# EAGLE board femtoBeacon_dongle_r2.0.1_PANELIZED (EAGLE 7.5.0), part 1 of 2
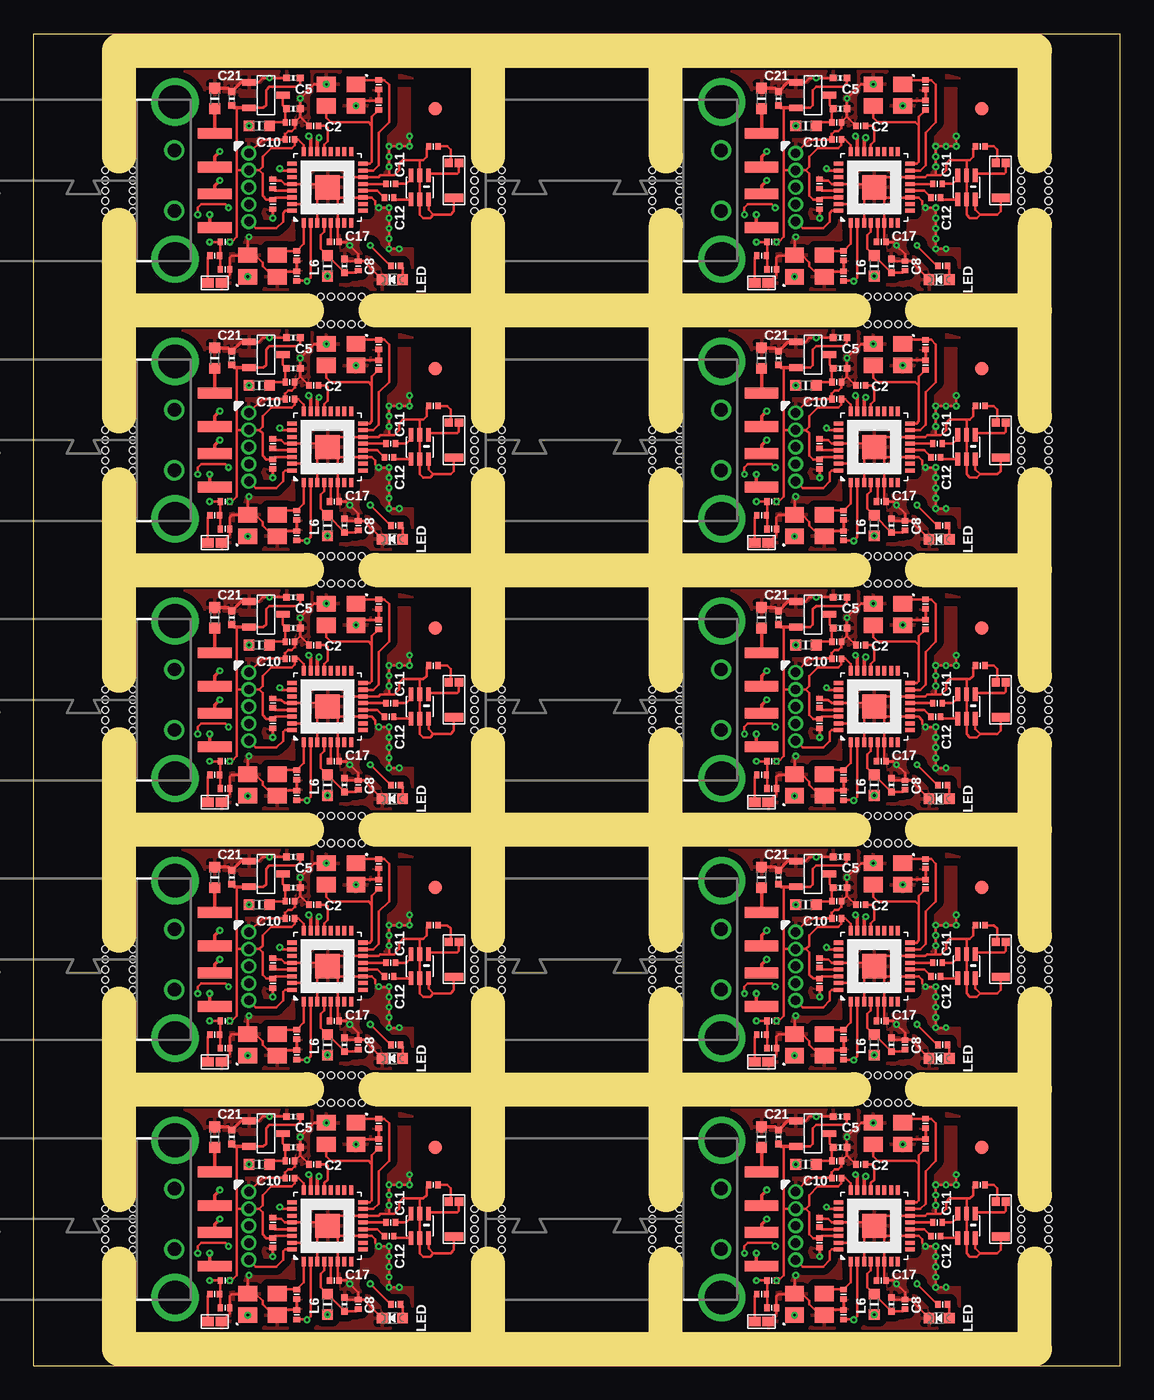
[diagram p0: board, top side]
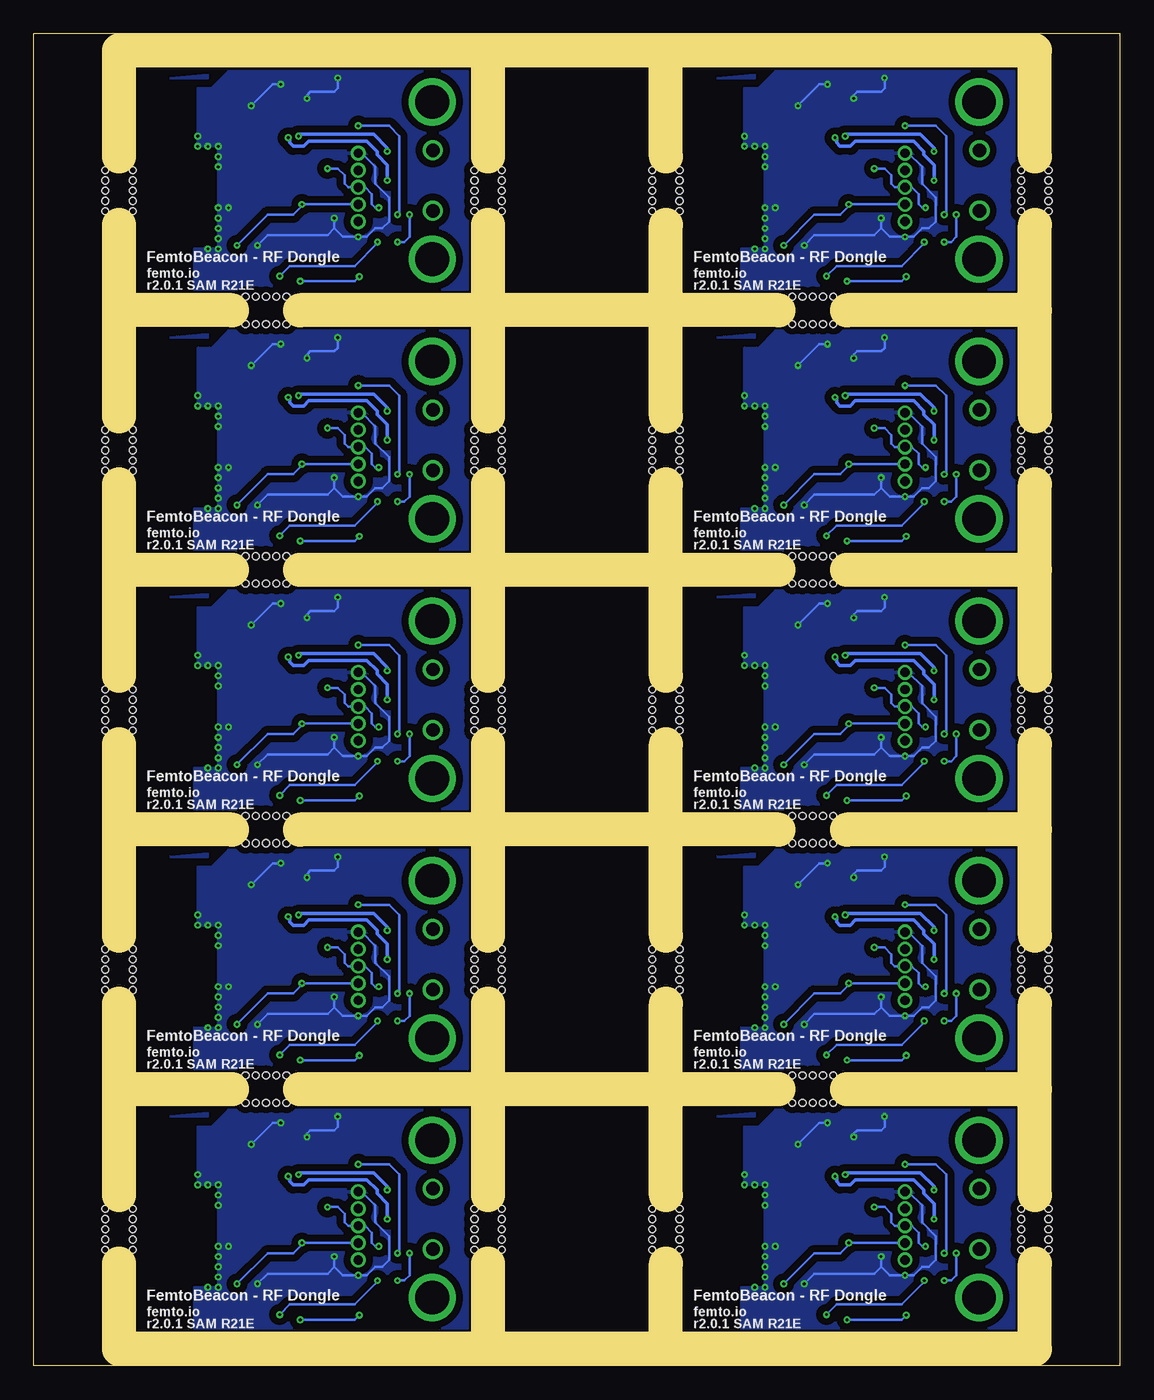
[diagram p1: board, bottom side, seen from below]

Size 80.77 x 99.06 mm. Coordinates in mm from the lower left corner, seen from the top.
Outline: 0,0 0,99.06 80.77,99.06 80.77,0 0,0
Copper layers (1+16): Top 0.035mm / dielectric 1.5mm / Bottom 0.035mm
Design rules "femtoduino_5mil_2layer": minimum track width 5mil, minimum drill 5mil, track to track 5mil, track to pad 5mil, pad to pad 5mil, via to via 5mil, smd to smd 5mil, copper to edge 5mil, drill to drill 5mil, minimum pad ring 8mil, minimum via ring 5mil, stop-mask expansion 2mil, vias tented up to drill 30mil, thermal gap 10mil
Holes 0.51 mm at 7.37,10.16 7.37,9.4 7.37,8.64 7.37,10.92 7.37,11.68 5.33,10.16 5.33,9.4 5.33,8.64 5.33,10.92 5.33,11.68 7.37,29.46 7.37,28.7 7.37,27.94 7.37,30.23 7.37,30.99 5.33,29.46 5.33,28.7 5.33,27.94 5.33,30.23 5.33,30.99 7.37,48.77 7.37,48.01 7.37,47.24 7.37,49.53 7.37,50.29 5.33,48.77 5.33,48.01 5.33,47.24 5.33,49.53 5.33,50.29 7.37,68.07 7.37,67.31 7.37,66.55 7.37,68.83 7.37,69.6 5.33,68.07 5.33,67.31 5.33,66.55 5.33,68.83 5.33,69.6 7.37,87.38 7.37,86.61 7.37,85.85 7.37,88.14 7.37,88.9 5.33,87.38 5.33,86.61 5.33,85.85 5.33,88.14 5.33,88.9 34.8,10.16 34.8,9.4 34.8,8.64 34.8,10.92 34.8,11.68 32.77,10.16 32.77,9.4 32.77,8.64 32.77,10.92 32.77,11.68 34.8,29.46 34.8,28.7 34.8,27.94 34.8,30.23 34.8,30.99 32.77,29.46 32.77,28.7 32.77,27.94 32.77,30.23 32.77,30.99 34.8,48.77 34.8,48.01 34.8,47.24 34.8,49.53 34.8,50.29 32.77,48.77 32.77,48.01 32.77,47.24 32.77,49.53 32.77,50.29 34.8,68.07 34.8,67.31 34.8,66.55 34.8,68.83 34.8,69.6 32.77,68.07 32.77,67.31 32.77,66.55 32.77,68.83 32.77,69.6 34.8,87.38 34.8,86.61 34.8,85.85 34.8,88.14 34.8,88.9 32.77,87.38 32.77,86.61 32.77,85.85 32.77,88.14 32.77,88.9 48.01,10.16 48.01,9.4 48.01,8.64 48.01,10.92 48.01,11.68 45.97,10.16 45.97,9.4 45.97,8.64 45.97,10.92 45.97,11.68 48.01,29.46 48.01,28.7 48.01,27.94 48.01,30.23 48.01,30.99 45.97,29.46 45.97,28.7 45.97,27.94 45.97,30.23 45.97,30.99 48.01,48.77 48.01,48.01 48.01,47.24 48.01,49.53 48.01,50.29 45.97,48.77 45.97,48.01 45.97,47.24 45.97,49.53 45.97,50.29 48.01,68.07 48.01,67.31 48.01,66.55 48.01,68.83 48.01,69.6 45.97,68.07 45.97,67.31 45.97,66.55 45.97,68.83 45.97,69.6 48.01,87.38 48.01,86.61 48.01,85.85 48.01,88.14 48.01,88.9 45.97,87.38 45.97,86.61 45.97,85.85 45.97,88.14 45.97,88.9 75.44,10.16 75.44,9.4 75.44,8.64 75.44,10.92 75.44,11.68 73.41,10.16 73.41,9.4 73.41,8.64 73.41,10.92 73.41,11.68 75.44,29.46 75.44,28.7 75.44,27.94 75.44,30.23 75.44,30.99 73.41,29.46 73.41,28.7 73.41,27.94 73.41,30.23 73.41,30.99 75.44,48.77 75.44,48.01 75.44,47.24 75.44,49.53 75.44,50.29 73.41,48.77 73.41,48.01 73.41,47.24 73.41,49.53 73.41,50.29 75.44,68.07 75.44,67.31 75.44,66.55 75.44,68.83 75.44,69.6 73.41,68.07 73.41,67.31 73.41,66.55 73.41,68.83 73.41,69.6 75.44,87.38 75.44,86.61 75.44,85.85 75.44,88.14 75.44,88.9 73.41,87.38 73.41,86.61 73.41,85.85 73.41,88.14 73.41,88.9 22.86,19.56 22.1,19.56 21.34,19.56 23.62,19.56 24.38,19.56 22.86,21.59 22.1,21.59 21.34,21.59 23.62,21.59 24.38,21.59 22.86,38.86 22.1,38.86 21.34,38.86 23.62,38.86 24.38,38.86 22.86,40.89 22.1,40.89 21.34,40.89 23.62,40.89 24.38,40.89 22.86,58.17 22.1,58.17 21.34,58.17 23.62,58.17 24.38,58.17 22.86,60.2 22.1,60.2 21.34,60.2 23.62,60.2 24.38,60.2 22.86,77.47 22.1,77.47 21.34,77.47 23.62,77.47 24.38,77.47 22.86,79.5 22.1,79.5 21.34,79.5 23.62,79.5 24.38,79.5 63.5,19.56 62.74,19.56 61.98,19.56 64.26,19.56 65.02,19.56 63.5,21.59 62.74,21.59 61.98,21.59 64.26,21.59 65.02,21.59 63.5,38.86 62.74,38.86 61.98,38.86 64.26,38.86 65.02,38.86 63.5,40.89 62.74,40.89 61.98,40.89 64.26,40.89 65.02,40.89 63.5,58.17 62.74,58.17 61.98,58.17 64.26,58.17 65.02,58.17 63.5,60.2 62.74,60.2 61.98,60.2 64.26,60.2 65.02,60.2 63.5,77.47 62.74,77.47 61.98,77.47 64.26,77.47 65.02,77.47 63.5,79.5 62.74,79.5 61.98,79.5 64.26,79.5 65.02,79.5
Milling: 40 lines

## Footprints (pad centres in the part's own frame; a part is rotated, then mirrored left to right if it is on the bottom)
ANT_BAR = smd 0.62 x 0.61: 1 -1.3,0.37; 2 -1.3,-0.38 | smd 0.62 x 1.36: 3 1.3,0
SPST_SMD = smd 0.889 x 0.699: 1 -0.508,0; 2 0.508,0
PART = smd 0.4 x 0.5: 1 -0.35,0; 2 0.35,0
_0402MP = smd 0.5 x 0.5: 1 -0.508,0; 2 0.508,0
USB_A-SMT = drill 2.5 pad 3.302: D1 -5.85,2.958; D2 5.85,2.958 | drill 1: D3 -2.25,3; D4 2.25,3 | smd 0.8 x 2.5: D+ 1,0; D- -1,0; GND 3.5,0; VBUS -3.5,0
_0603MP = smd 0.8 x 0.8: 1 -0.762,0; 2 0.762,0
FIDUCIAL_1MM = smd 1 x 1: 1 0,0
MCP1700T-3302E/TT = smd 0.5 x 1: GND -0.95,-1.25; VIN 0,1.25; VOUT 0.95,-1.25
CHIPLED_0603_NOOUTLINE = smd 0.8 x 0.8: A 0,-0.75; C 0,0.75
1X5_ROUND = drill 0.7 pad 1: P$1 0,0; P$2 0,-1.27; P$3 0,-2.54; P$4 0,-3.81; P$5 0,-5.08
0805_BALUN = smd 1 x 0.35: 1 -0.9,0.65; 2 -0.9,0; 3 -0.9,-0.65; 4 0.9,-0.65; 5 0.9,0; 6 0.9,0.65
QFN32 = smd 0.7 x 0.3: 1 -2.65,1.75; 2 -2.65,1.25; 3 -2.65,0.75; 4 -2.65,0.25; 5 -2.65,-0.25; 6 -2.65,-0.75; 7 -2.65,-1.25; 8 -2.65,-1.75; 17 2.65,-1.75; 18 2.65,-1.25; 19 2.65,-0.75; 20 2.65,-0.25; 21 2.65,0.25; 22 2.65,0.75; 23 2.65,1.25; 24 2.65,1.75 | smd 0.3 x 0.7: 9 -1.75,-2.65; 10 -1.25,-2.65; 11 -0.75,-2.65; 12 -0.25,-2.65; 13 0.25,-2.65; 14 0.75,-2.65; 15 1.25,-2.65; 16 1.75,-2.65; 25 1.75,2.65; 26 1.25,2.65; 27 0.75,2.65; 28 0.25,2.65; 29 -0.25,2.65; 30 -0.75,2.65; 31 -1.25,2.65; 32 -1.75,2.65 | smd 1.8 x 1.8: 33 0,0
TSX-3225 = smd 1.4 x 1.15: 1 -1.1,-0.8; 2 1.1,-0.8; 3 1.1,0.8; 4 -1.1,0.8

## Placement (x,y rotation side)
ANT1  PULSE_ANT_2.4GHZ  [ANT_BAR]  31.24,10.92 270 top
ANT2  PULSE_ANT_2.4GHZ  [ANT_BAR]  31.24,30.23 270 top
ANT3  PULSE_ANT_2.4GHZ  [ANT_BAR]  31.24,49.53 270 top
ANT4  PULSE_ANT_2.4GHZ  [ANT_BAR]  31.24,68.83 270 top
ANT5  PULSE_ANT_2.4GHZ  [ANT_BAR]  31.24,88.14 270 top
ANT6  PULSE_ANT_2.4GHZ  [ANT_BAR]  71.88,10.92 270 top
ANT7  PULSE_ANT_2.4GHZ  [ANT_BAR]  71.88,30.23 270 top
ANT8  PULSE_ANT_2.4GHZ  [ANT_BAR]  71.88,49.53 270 top
ANT9  PULSE_ANT_2.4GHZ  [ANT_BAR]  71.88,68.83 270 top
ANT10  PULSE_ANT_2.4GHZ  [ANT_BAR]  71.88,88.14 270 top
BTN  DNP  [SPST_SMD]  13.46,3.3 0 top
BTN1  DNP  [SPST_SMD]  13.46,22.61 0 top
BTN2  DNP  [SPST_SMD]  13.46,41.91 0 top
BTN3  DNP  [SPST_SMD]  13.46,61.21 0 top
BTN4  DNP  [SPST_SMD]  13.46,80.52 0 top
BTN5  DNP  [SPST_SMD]  54.1,3.3 0 top
BTN6  DNP  [SPST_SMD]  54.1,22.61 0 top
BTN7  DNP  [SPST_SMD]  54.1,41.91 0 top
BTN8  DNP  [SPST_SMD]  54.1,61.21 0 top
BTN9  DNP  [SPST_SMD]  54.1,80.52 0 top
C1  0.1uF  [PART]  14.22,4.32 0 top
C2  0.1uF  [PART]  20.83,14.99 180 top
C3  10pF  [PART]  25.65,18.03 90 top
C4  10pF  [PART]  25.65,16.51 90 top
C5  2.2uF  [_0402MP]  19.3,18.54 180 top
C6  2.2uF  [_0402MP]  19.3,16.26 0 top
C7  0.47uF  [PART]  19.05,15.24 0 top
C8  0.1uF  [PART]  24.13,4.57 90 top
C9  0.1uF  [PART]  17.78,10.67 90 top
C10  0.1uF  [PART]  19.05,13.97 180 top
C11  22pF, C0G, 5%  [PART]  26.54,10.67 0 top
C12  22pF, C0G, 5%  [PART]  26.42,9.65 0 top
C13  DNP  [PART]  29.72,13.46 180 top
C14  9pF  [PART]  19.56,3.81 270 top
C15  9pF  [PART]  19.56,5.33 270 top
C16  0.1uF  [PART]  17.78,9.14 270 top
C17  0.1uF  [PART]  22.35,6.35 0 top
C18  0.1uF  [PART]  14.22,23.62 0 top
C19  0.1uF  [PART]  19.05,33.27 180 top
C20  22pF, C0G, 5%  [PART]  26.54,29.97 0 top
C21  10uF  [_0402MP]  14.73,17.02 270 top
C22  10uF  [_0402MP]  23.11,4.57 270 top
C23  22pF, C0G, 5%  [PART]  26.42,28.96 0 top
C24  DNP  [PART]  29.72,32.77 180 top
C25  9pF  [PART]  19.56,23.11 270 top
C26  9pF  [PART]  19.56,24.64 270 top
C27  0.1uF  [PART]  17.78,28.45 270 top
C28  0.1uF  [PART]  22.35,25.65 0 top
C29  0.1uF  [PART]  20.83,34.29 180 top
C30  10uF  [_0402MP]  14.73,36.32 270 top
C31  10uF  [_0402MP]  23.11,23.88 270 top
C32  10pF  [PART]  25.65,37.34 90 top
C33  10pF  [PART]  25.65,35.81 90 top
C34  2.2uF  [_0402MP]  19.3,37.85 180 top
C35  2.2uF  [_0402MP]  19.3,35.56 0 top
C36  0.47uF  [PART]  19.05,34.54 0 top
C37  0.1uF  [PART]  24.13,23.88 90 top
C38  0.1uF  [PART]  17.78,29.97 90 top
C39  0.1uF  [PART]  14.22,42.93 0 top
C40  0.1uF  [PART]  19.05,52.58 180 top
C41  22pF, C0G, 5%  [PART]  26.54,49.28 0 top
C42  22pF, C0G, 5%  [PART]  26.42,48.26 0 top
C43  DNP  [PART]  29.72,52.07 180 top
C44  9pF  [PART]  19.56,42.42 270 top
C45  9pF  [PART]  19.56,43.94 270 top
C46  0.1uF  [PART]  17.78,47.75 270 top
C47  0.1uF  [PART]  22.35,44.96 0 top
C48  0.1uF  [PART]  20.83,53.59 180 top
C49  10uF  [_0402MP]  14.73,55.63 270 top
C50  10uF  [_0402MP]  23.11,43.18 270 top
C51  10pF  [PART]  25.65,56.64 90 top
C52  10pF  [PART]  25.65,55.12 90 top
C53  2.2uF  [_0402MP]  19.3,57.15 180 top
C54  2.2uF  [_0402MP]  19.3,54.86 0 top
C55  0.47uF  [PART]  19.05,53.85 0 top
C56  0.1uF  [PART]  24.13,43.18 90 top
C57  0.1uF  [PART]  17.78,49.28 90 top
C58  0.1uF  [PART]  14.22,62.23 0 top
C59  0.1uF  [PART]  19.05,71.88 180 top
C60  22pF, C0G, 5%  [PART]  26.54,68.58 0 top
C61  22pF, C0G, 5%  [PART]  26.42,67.56 0 top
C62  DNP  [PART]  29.72,71.37 180 top
C63  9pF  [PART]  19.56,61.72 270 top
C64  9pF  [PART]  19.56,63.25 270 top
C65  0.1uF  [PART]  17.78,67.06 270 top
C66  0.1uF  [PART]  22.35,64.26 0 top
C67  0.1uF  [PART]  20.83,72.9 180 top
C68  10uF  [_0402MP]  14.73,74.93 270 top
C69  10uF  [_0402MP]  23.11,62.48 270 top
C70  10pF  [PART]  25.65,75.95 90 top
C71  10pF  [PART]  25.65,74.42 90 top
C72  2.2uF  [_0402MP]  19.3,76.45 180 top
C73  2.2uF  [_0402MP]  19.3,74.17 0 top
C74  0.47uF  [PART]  19.05,73.15 0 top
C75  0.1uF  [PART]  24.13,62.48 90 top
C76  0.1uF  [PART]  17.78,68.58 90 top
C77  0.1uF  [PART]  14.22,81.53 0 top
C78  0.1uF  [PART]  19.05,91.19 180 top
C79  22pF, C0G, 5%  [PART]  26.54,87.88 0 top
C80  22pF, C0G, 5%  [PART]  26.42,86.87 0 top
C81  DNP  [PART]  29.72,90.68 180 top
C82  9pF  [PART]  19.56,81.03 270 top
C83  9pF  [PART]  19.56,82.55 270 top
C84  0.1uF  [PART]  17.78,86.36 270 top
C85  0.1uF  [PART]  22.35,83.57 0 top
C86  0.1uF  [PART]  20.83,92.2 180 top
C87  10uF  [_0402MP]  14.73,94.23 270 top
C88  10uF  [_0402MP]  23.11,81.79 270 top
C89  10pF  [PART]  25.65,95.25 90 top
C90  10pF  [PART]  25.65,93.73 90 top
C91  2.2uF  [_0402MP]  19.3,95.76 180 top
C92  2.2uF  [_0402MP]  19.3,93.47 0 top
C93  0.47uF  [PART]  19.05,92.46 0 top
C94  0.1uF  [PART]  24.13,81.79 90 top
C95  0.1uF  [PART]  17.78,87.88 90 top
C96  0.1uF  [PART]  54.86,4.32 0 top
C97  0.1uF  [PART]  59.69,13.97 180 top
C98  22pF, C0G, 5%  [PART]  67.18,10.67 0 top
C99  22pF, C0G, 5%  [PART]  67.06,9.65 0 top
C100  DNP  [PART]  70.36,13.46 180 top
C101  9pF  [PART]  60.2,3.81 270 top
C102  9pF  [PART]  60.2,5.33 270 top
C103  0.1uF  [PART]  58.42,9.14 270 top
C104  0.1uF  [PART]  62.99,6.35 0 top
C105  0.1uF  [PART]  61.47,14.99 180 top
C106  10uF  [_0402MP]  55.37,17.02 270 top
C107  10uF  [_0402MP]  63.75,4.57 270 top
C108  10pF  [PART]  66.29,18.03 90 top
C109  10pF  [PART]  66.29,16.51 90 top
C110  2.2uF  [_0402MP]  59.94,18.54 180 top
C111  2.2uF  [_0402MP]  59.94,16.26 0 top
C112  0.47uF  [PART]  59.69,15.24 0 top
C113  0.1uF  [PART]  64.77,4.57 90 top
C114  0.1uF  [PART]  58.42,10.67 90 top
C115  0.1uF  [PART]  54.86,23.62 0 top
C116  0.1uF  [PART]  59.69,33.27 180 top
C117  22pF, C0G, 5%  [PART]  67.18,29.97 0 top
C118  22pF, C0G, 5%  [PART]  67.06,28.96 0 top
C119  DNP  [PART]  70.36,32.77 180 top
C120  9pF  [PART]  60.2,23.11 270 top
C121  9pF  [PART]  60.2,24.64 270 top
C122  0.1uF  [PART]  58.42,28.45 270 top
C123  0.1uF  [PART]  62.99,25.65 0 top
C124  0.1uF  [PART]  61.47,34.29 180 top
C125  10uF  [_0402MP]  55.37,36.32 270 top
C126  10uF  [_0402MP]  63.75,23.88 270 top
C127  10pF  [PART]  66.29,37.34 90 top
C128  10pF  [PART]  66.29,35.81 90 top
C129  2.2uF  [_0402MP]  59.94,37.85 180 top
C130  2.2uF  [_0402MP]  59.94,35.56 0 top
C131  0.47uF  [PART]  59.69,34.54 0 top
C132  0.1uF  [PART]  64.77,23.88 90 top
C133  0.1uF  [PART]  58.42,29.97 90 top
C134  0.1uF  [PART]  54.86,42.93 0 top
C135  0.1uF  [PART]  59.69,52.58 180 top
C136  22pF, C0G, 5%  [PART]  67.18,49.28 0 top
C137  22pF, C0G, 5%  [PART]  67.06,48.26 0 top
C138  DNP  [PART]  70.36,52.07 180 top
C139  9pF  [PART]  60.2,42.42 270 top
C140  9pF  [PART]  60.2,43.94 270 top
C141  0.1uF  [PART]  58.42,47.75 270 top
C142  0.1uF  [PART]  62.99,44.96 0 top
C143  0.1uF  [PART]  61.47,53.59 180 top
C144  10uF  [_0402MP]  55.37,55.63 270 top
C145  10uF  [_0402MP]  63.75,43.18 270 top
C146  10pF  [PART]  66.29,56.64 90 top
C147  10pF  [PART]  66.29,55.12 90 top
C148  2.2uF  [_0402MP]  59.94,57.15 180 top
C149  2.2uF  [_0402MP]  59.94,54.86 0 top
C150  0.47uF  [PART]  59.69,53.85 0 top
C151  0.1uF  [PART]  64.77,43.18 90 top
C152  0.1uF  [PART]  58.42,49.28 90 top
C153  0.1uF  [PART]  54.86,62.23 0 top
C154  0.1uF  [PART]  59.69,71.88 180 top
C155  22pF, C0G, 5%  [PART]  67.18,68.58 0 top
C156  22pF, C0G, 5%  [PART]  67.06,67.56 0 top
C157  DNP  [PART]  70.36,71.37 180 top
C158  9pF  [PART]  60.2,61.72 270 top
C159  9pF  [PART]  60.2,63.25 270 top
C160  0.1uF  [PART]  58.42,67.06 270 top
C161  0.1uF  [PART]  62.99,64.26 0 top
C162  0.1uF  [PART]  61.47,72.9 180 top
C163  10uF  [_0402MP]  55.37,74.93 270 top
C164  10uF  [_0402MP]  63.75,62.48 270 top
C165  10pF  [PART]  66.29,75.95 90 top
C166  10pF  [PART]  66.29,74.42 90 top
C167  2.2uF  [_0402MP]  59.94,76.45 180 top
C168  2.2uF  [_0402MP]  59.94,74.17 0 top
C169  0.47uF  [PART]  59.69,73.15 0 top
C170  0.1uF  [PART]  64.77,62.48 90 top
C171  0.1uF  [PART]  58.42,68.58 90 top
C172  0.1uF  [PART]  54.86,81.53 0 top
C173  0.1uF  [PART]  59.69,91.19 180 top
C174  22pF, C0G, 5%  [PART]  67.18,87.88 0 top
C175  22pF, C0G, 5%  [PART]  67.06,86.87 0 top
C176  DNP  [PART]  70.36,90.68 180 top
C177  9pF  [PART]  60.2,81.03 270 top
C178  9pF  [PART]  60.2,82.55 270 top
C179  0.1uF  [PART]  58.42,86.36 270 top
C180  0.1uF  [PART]  62.99,83.57 0 top
C181  0.1uF  [PART]  61.47,92.2 180 top
C182  10uF  [_0402MP]  55.37,94.23 270 top
C183  10uF  [_0402MP]  63.75,81.79 270 top
C184  10pF  [PART]  66.29,95.25 90 top
C185  10pF  [PART]  66.29,93.73 90 top
C186  2.2uF  [_0402MP]  59.94,95.76 180 top
C187  2.2uF  [_0402MP]  59.94,93.47 0 top
C188  0.47uF  [PART]  59.69,92.46 0 top
C189  0.1uF  [PART]  64.77,81.79 90 top
C190  0.1uF  [PART]  58.42,87.88 90 top
CN1  [USB_A-SMT]  13.46,10.92 90 top
CN2  [USB_A-SMT]  13.46,30.23 90 top
CN3  [USB_A-SMT]  13.46,49.53 90 top
CN4  [USB_A-SMT]  13.46,68.83 90 top
CN5  [USB_A-SMT]  13.46,88.14 90 top
CN6  [USB_A-SMT]  54.1,10.92 90 top
CN7  [USB_A-SMT]  54.1,30.23 90 top
CN8  [USB_A-SMT]  54.1,49.53 90 top
CN9  [USB_A-SMT]  54.1,68.83 90 top
CN10  [USB_A-SMT]  54.1,88.14 90 top
FB1  [_0603MP]  13.46,17.02 90 top
FB2  [_0603MP]  16.76,14.99 0 top
FB3  [_0603MP]  13.46,36.32 90 top
FB4  [_0603MP]  16.76,34.29 0 top
FB5  [_0603MP]  13.46,55.63 90 top
FB6  [_0603MP]  16.76,53.59 0 top
FB7  [_0603MP]  13.46,74.93 90 top
FB8  [_0603MP]  16.76,72.9 0 top
FB9  [_0603MP]  13.46,94.23 90 top
FB10  [_0603MP]  16.76,92.2 0 top
FB11  [_0603MP]  54.1,17.02 90 top
FB12  [_0603MP]  57.4,14.99 0 top
FB13  [_0603MP]  54.1,36.32 90 top
FB14  [_0603MP]  57.4,34.29 0 top
FB15  [_0603MP]  54.1,55.63 90 top
FB16  [_0603MP]  57.4,53.59 0 top
FB17  [_0603MP]  54.1,74.93 90 top
FB18  [_0603MP]  57.4,72.9 0 top
FB19  [_0603MP]  54.1,94.23 90 top
FB20  [_0603MP]  57.4,92.2 0 top
FID1  FIDUCIAL  [FIDUCIAL_1MM]  29.84,16.26 0 top
FID2  FIDUCIAL  [FIDUCIAL_1MM]  29.84,35.56 0 top
FID3  FIDUCIAL  [FIDUCIAL_1MM]  29.84,54.86 0 top
FID4  FIDUCIAL  [FIDUCIAL_1MM]  29.84,74.17 0 top
FID5  FIDUCIAL  [FIDUCIAL_1MM]  29.84,93.47 0 top
FID6  FIDUCIAL  [FIDUCIAL_1MM]  70.48,16.26 0 top
FID7  FIDUCIAL  [FIDUCIAL_1MM]  70.48,35.56 0 top
FID8  FIDUCIAL  [FIDUCIAL_1MM]  70.48,54.86 0 top
FID9  FIDUCIAL  [FIDUCIAL_1MM]  70.48,74.17 0 top
FID10  FIDUCIAL  [FIDUCIAL_1MM]  70.48,93.47 0 top
L1  10uH  [_0603MP]  21.84,23.88 90 top
L2  10uH  [_0603MP]  21.84,43.18 90 top
L3  10uH  [_0603MP]  21.84,62.48 90 top
L4  10uH  [_0603MP]  21.84,81.79 90 top
L5  10uH  [_0603MP]  62.48,4.57 90 top
L6  10uH  [_0603MP]  21.84,4.57 90 top
L7  10uH  [_0603MP]  62.48,23.88 90 top
L8  10uH  [_0603MP]  62.48,43.18 90 top
L9  10uH  [_0603MP]  62.48,62.48 90 top
L10  10uH  [_0603MP]  62.48,81.79 90 top
LDO_VREG  MCP1700T-3302E/TT  [MCP1700T-3302E/TT]  17.27,17.27 270 top
LDO_VREG1  MCP1700T-3302E/TT  [MCP1700T-3302E/TT]  17.27,36.58 270 top
LDO_VREG2  MCP1700T-3302E/TT  [MCP1700T-3302E/TT]  17.27,55.88 270 top
LDO_VREG3  MCP1700T-3302E/TT  [MCP1700T-3302E/TT]  17.27,75.18 270 top
LDO_VREG4  MCP1700T-3302E/TT  [MCP1700T-3302E/TT]  17.27,94.49 270 top
LDO_VREG5  MCP1700T-3302E/TT  [MCP1700T-3302E/TT]  57.91,17.27 270 top
LDO_VREG6  MCP1700T-3302E/TT  [MCP1700T-3302E/TT]  57.91,36.58 270 top
LDO_VREG7  MCP1700T-3302E/TT  [MCP1700T-3302E/TT]  57.91,55.88 270 top
LDO_VREG8  MCP1700T-3302E/TT  [MCP1700T-3302E/TT]  57.91,75.18 270 top
LDO_VREG9  MCP1700T-3302E/TT  [MCP1700T-3302E/TT]  57.91,94.49 270 top
LED  BLUE  [CHIPLED_0603_NOOUTLINE]  26.67,3.56 90 top
LED1  BLUE  [CHIPLED_0603_NOOUTLINE]  26.67,22.86 90 top
LED2  BLUE  [CHIPLED_0603_NOOUTLINE]  26.67,42.16 90 top
LED3  BLUE  [CHIPLED_0603_NOOUTLINE]  26.67,61.47 90 top
LED4  BLUE  [CHIPLED_0603_NOOUTLINE]  26.67,80.77 90 top
LED5  BLUE  [CHIPLED_0603_NOOUTLINE]  67.31,3.56 90 top
LED6  BLUE  [CHIPLED_0603_NOOUTLINE]  67.31,22.86 90 top
LED7  BLUE  [CHIPLED_0603_NOOUTLINE]  67.31,42.16 90 top
LED8  BLUE  [CHIPLED_0603_NOOUTLINE]  67.31,61.47 90 top
LED9  BLUE  [CHIPLED_0603_NOOUTLINE]  67.31,80.77 90 top
R1  330  [PART]  13.46,5.33 0 top
R2  10K  [PART]  14.22,6.35 0 top
R3  330  [PART]  13.46,24.64 0 top
R4  330  [PART]  26.92,4.57 0 top
R5  10K  [PART]  14.22,25.65 0 top
R6  330  [PART]  26.92,23.88 0 top
R7  330  [PART]  13.46,43.94 0 top
R8  10K  [PART]  14.22,44.96 0 top
R9  330  [PART]  26.92,43.18 0 top
R10  330  [PART]  13.46,63.25 0 top
R11  10K  [PART]  14.22,64.26 0 top
R12  330  [PART]  26.92,62.48 0 top
R13  330  [PART]  13.46,82.55 0 top
R14  10K  [PART]  14.22,83.57 0 top
R15  330  [PART]  26.92,81.79 0 top
R16  330  [PART]  54.1,5.33 0 top
R17  10K  [PART]  54.86,6.35 0 top
R18  330  [PART]  67.56,4.57 0 top
R19  330  [PART]  54.1,24.64 0 top
R20  10K  [PART]  54.86,25.65 0 top
R21  330  [PART]  67.56,23.88 0 top
R22  330  [PART]  54.1,43.94 0 top
R23  10K  [PART]  54.86,44.96 0 top
R24  330  [PART]  67.56,43.18 0 top
R25  330  [PART]  54.1,63.25 0 top
R26  10K  [PART]  54.86,64.26 0 top
R27  330  [PART]  67.56,62.48 0 top
R28  330  [PART]  54.1,82.55 0 top
R29  10K  [PART]  54.86,83.57 0 top
R30  330  [PART]  67.56,81.79 0 top
U$1  1X5_ROUND  [1X5_ROUND]  16,12.95 0 top
U$2  JOHANSON_2450BM15A0015E  [0805_BALUN]  28.7,29.72 270 top
U$3  ATSAMR21E18A-MUT  [QFN32]  21.84,29.72 90 top
U$4  1X5_ROUND  [1X5_ROUND]  16,32.26 0 top
U$5  JOHANSON_2450BM15A0015E  [0805_BALUN]  28.7,49.02 270 top
U$6  ATSAMR21E18A-MUT  [QFN32]  21.84,49.02 90 top
U$7  1X5_ROUND  [1X5_ROUND]  16,51.56 0 top
U$8  JOHANSON_2450BM15A0015E  [0805_BALUN]  28.7,68.33 270 top
U$9  ATSAMR21E18A-MUT  [QFN32]  21.84,68.33 90 top
U$10  1X5_ROUND  [1X5_ROUND]  16,70.87 0 top
U$11  JOHANSON_2450BM15A0015E  [0805_BALUN]  28.7,87.63 270 top
U$12  JOHANSON_2450BM15A0015E  [0805_BALUN]  28.7,10.41 270 top
U$13  ATSAMR21E18A-MUT  [QFN32]  21.84,87.63 90 top
U$14  1X5_ROUND  [1X5_ROUND]  16,90.17 0 top
U$15  JOHANSON_2450BM15A0015E  [0805_BALUN]  69.34,10.41 270 top
U$16  ATSAMR21E18A-MUT  [QFN32]  62.48,10.41 90 top
U$17  1X5_ROUND  [1X5_ROUND]  56.64,12.95 0 top
U$18  JOHANSON_2450BM15A0015E  [0805_BALUN]  69.34,29.72 270 top
U$19  ATSAMR21E18A-MUT  [QFN32]  62.48,29.72 90 top
U$20  1X5_ROUND  [1X5_ROUND]  56.64,32.26 0 top
U$21  JOHANSON_2450BM15A0015E  [0805_BALUN]  69.34,49.02 270 top
U$22  ATSAMR21E18A-MUT  [QFN32]  62.48,49.02 90 top
U$23  1X5_ROUND  [1X5_ROUND]  56.64,51.56 0 top
U$24  JOHANSON_2450BM15A0015E  [0805_BALUN]  69.34,68.33 270 top
U$25  ATSAMR21E18A-MUT  [QFN32]  62.48,68.33 90 top
U$26  1X5_ROUND  [1X5_ROUND]  56.64,70.87 0 top
U$27  JOHANSON_2450BM15A0015E  [0805_BALUN]  69.34,87.63 270 top
U$28  ATSAMR21E18A-MUT  [QFN32]  62.48,87.63 90 top
U$29  1X5_ROUND  [1X5_ROUND]  56.64,90.17 0 top
U$76  ATSAMR21E18A-MUT  [QFN32]  21.84,10.41 90 top
XOSC  12MHz  [TSX-3225]  22.86,17.27 180 top
XOSC1  12MHz  [TSX-3225]  22.86,36.58 180 top
XOSC2  12MHz  [TSX-3225]  22.86,55.88 180 top
XOSC3  12MHz  [TSX-3225]  22.86,75.18 180 top
XOSC4  12MHz  [TSX-3225]  22.86,94.49 180 top
XOSC5  12MHz  [TSX-3225]  63.5,17.27 180 top
XOSC6  12MHz  [TSX-3225]  63.5,36.58 180 top
XOSC7  12MHz  [TSX-3225]  63.5,55.88 180 top
XOSC8  12MHz  [TSX-3225]  63.5,75.18 180 top
XOSC9  12MHz  [TSX-3225]  63.5,94.49 180 top
XOSCRF  16MHz  [TSX-3225]  17.02,4.57 0 top
XOSCRF1  16MHz  [TSX-3225]  17.02,23.88 0 top
XOSCRF2  16MHz  [TSX-3225]  17.02,43.18 0 top
XOSCRF3  16MHz  [TSX-3225]  17.02,62.48 0 top
XOSCRF4  16MHz  [TSX-3225]  17.02,81.79 0 top
XOSCRF5  16MHz  [TSX-3225]  57.66,4.57 0 top
XOSCRF6  16MHz  [TSX-3225]  57.66,23.88 0 top
XOSCRF7  16MHz  [TSX-3225]  57.66,43.18 0 top
XOSCRF8  16MHz  [TSX-3225]  57.66,62.48 0 top
XOSCRF9  16MHz  [TSX-3225]  57.66,81.79 0 top

## Library data of the parts
ANT1-ANT10 = bar_antenna
BTN BTN1-BTN9 = femtoduino
C1 C3 C4 C8-C20 C23-C28 C32 C33 C37-C47 C51 C52 C56-C66 C70 C71 C75-C85 C89 C90 C94-C104 C108 C109 C113-C123 C127 C128 C132-C142 C146 C147 C151-C161 C165 C166 C170-C180 C184 C185 C189 C190 = parts_0201; DIGIKEY_PART: 490-3194-1-ND
C2 C7 C29 C36 C48 C55 C67 C74 C86 C93 C105 C112 C124 C131 C143 C150 C162 C169 C181 C188 R1-R30 = parts_0201
C5 C6 C21 C22 C30 C31 C34 C35 C49 C50 C53 C54 C68 C69 C72 C73 C87 C88 C91 C92 C106 C107 C110 C111 C125 C126 C129 C130 C144 C145 C148 C149 C163 C164 C167 C168 C182 C183 C186 C187 CN1-CN10 FB1-FB20 L1-L10 LED LED1-LED9 = microbuilder
FID1-FID10 = adafruit
LDO_VREG LDO_VREG1-LDO_VREG9 = MCP1700T-3302E_TT
U$1 U$4 U$7 U$10 U$14 U$17 U$20 U$23 U$26 U$29 = pins_fine_pitch
U$2 U$5 U$8 U$11 U$12 U$15 U$18 U$21 U$24 U$27 = balun
U$3 U$6 U$9 U$13 U$16 U$19 U$22 U$25 U$28 U$76 = atmel-samr21
XOSC XOSC1-XOSC9 XOSCRF XOSCRF1-XOSCRF9 = crystals

## Nets
3.3V: C5.1 C10.1 C16.1 C21.2 L6.1 LDO_VREG.VOUT R2.2 U$1.P$2 U$76.24 U$76.30
3.3V1: C19.1 C27.1 C30.2 C34.1 L1.1 LDO_VREG1.VOUT R5.2 U$3.24 U$3.30 U$4.P$2
3.3V2: C40.1 C46.1 C49.2 C53.1 L2.1 LDO_VREG2.VOUT R8.2 U$6.24 U$6.30 U$7.P$2
3.3V3: C59.1 C65.1 C68.2 C72.1 L3.1 LDO_VREG3.VOUT R11.2 U$9.24 U$9.30 U$10.P$2
3.3V4: C78.1 C84.1 C87.2 C91.1 L4.1 LDO_VREG4.VOUT R14.2 U$13.24 U$13.30 U$14.P$2
3.3V5: C97.1 C103.1 C106.2 C110.1 L5.1 LDO_VREG5.VOUT R17.2 U$16.24 U$16.30 U$17.P$2
3.3V6: C116.1 C122.1 C125.2 C129.1 L7.1 LDO_VREG6.VOUT R20.2 U$19.24 U$19.30 U$20.P$2
3.3V7: C135.1 C141.1 C144.2 C148.1 L8.1 LDO_VREG7.VOUT R23.2 U$22.24 U$22.30 U$23.P$2
3.3V8: C154.1 C160.1 C163.2 C167.1 L9.1 LDO_VREG8.VOUT R26.2 U$25.24 U$25.30 U$26.P$2
3.3V9: C173.1 C179.1 C182.2 C186.1 L10.1 LDO_VREG9.VOUT R29.2 U$28.24 U$28.30 U$29.P$2
ANT_OUT: ANT1.1 U$12.1
ANT_OUT1: ANT2.1 U$2.1
ANT_OUT2: ANT3.1 U$5.1
ANT_OUT3: ANT4.1 U$8.1
ANT_OUT4: ANT5.1 U$11.1
ANT_OUT5: ANT6.1 U$15.1
ANT_OUT6: ANT7.1 U$18.1
ANT_OUT7: ANT8.1 U$21.1
ANT_OUT8: ANT9.1 U$24.1
ANT_OUT9: ANT10.1 U$27.1
AVDD: C17.1 U$76.5
AVDD1: C28.1 U$3.5
AVDD2: C47.1 U$6.5
AVDD3: C66.1 U$9.5
AVDD4: C85.1 U$13.5
AVDD5: C104.1 U$16.5
AVDD6: C123.1 U$19.5
AVDD7: C142.1 U$22.5
AVDD8: C161.1 U$25.5
AVDD9: C180.1 U$28.5
DVDD: C2.1 U$76.21
DVDD1: C29.1 U$3.21
DVDD2: C48.1 U$6.21
DVDD3: C67.1 U$9.21
DVDD4: C86.1 U$13.21
DVDD5: C105.1 U$16.21
DVDD6: C124.1 U$19.21
DVDD7: C143.1 U$22.21
DVDD8: C162.1 U$25.21
DVDD9: C181.1 U$28.21
GND: ANT1.3 BTN.2 C1.2 C2.2 C3.1 C4.2 C5.2 C6.2 C7.2 C8.2 C9.2 C10.2 C13.2 C14.1 C15.2 C16.2 C17.2 C21.1 C22.1 FB1.2 LDO_VREG.GND LED.C U$1.P$1 U$12.2 U$12.5 U$12.6 U$76.3 U$76.6 U$76.11 U$76.14 U$76.28 U$76.33 XOSC.2 XOSC.4 XOSCRF.2 XOSCRF.4
GND1: ANT2.3 BTN1.2 C18.2 C19.2 C24.2 C25.1 C26.2 C27.2 C28.2 C29.2 C30.1 C31.1 C32.1 C33.2 C34.2 C35.2 C36.2 C37.2 C38.2 FB3.2 LDO_VREG1.GND LED1.C U$2.2 U$2.5 U$2.6 U$3.3 U$3.6 U$3.11 U$3.14 U$3.28 U$3.33 U$4.P$1 XOSC1.2 XOSC1.4 XOSCRF1.2 XOSCRF1.4
GND2: ANT3.3 BTN2.2 C39.2 C40.2 C43.2 C44.1 C45.2 C46.2 C47.2 C48.2 C49.1 C50.1 C51.1 C52.2 C53.2 C54.2 C55.2 C56.2 C57.2 FB5.2 LDO_VREG2.GND LED2.C U$5.2 U$5.5 U$5.6 U$6.3 U$6.6 U$6.11 U$6.14 U$6.28 U$6.33 U$7.P$1 XOSC2.2 XOSC2.4 XOSCRF2.2 XOSCRF2.4
GND3: ANT4.3 BTN3.2 C58.2 C59.2 C62.2 C63.1 C64.2 C65.2 C66.2 C67.2 C68.1 C69.1 C70.1 C71.2 C72.2 C73.2 C74.2 C75.2 C76.2 FB7.2 LDO_VREG3.GND LED3.C U$8.2 U$8.5 U$8.6 U$9.3 U$9.6 U$9.11 U$9.14 U$9.28 U$9.33 U$10.P$1 XOSC3.2 XOSC3.4 XOSCRF3.2 XOSCRF3.4
GND4: ANT5.3 BTN4.2 C77.2 C78.2 C81.2 C82.1 C83.2 C84.2 C85.2 C86.2 C87.1 C88.1 C89.1 C90.2 C91.2 C92.2 C93.2 C94.2 C95.2 FB9.2 LDO_VREG4.GND LED4.C U$11.2 U$11.5 U$11.6 U$13.3 U$13.6 U$13.11 U$13.14 U$13.28 U$13.33 U$14.P$1 XOSC4.2 XOSC4.4 XOSCRF4.2 XOSCRF4.4
GND5: ANT6.3 BTN5.2 C96.2 C97.2 C100.2 C101.1 C102.2 C103.2 C104.2 C105.2 C106.1 C107.1 C108.1 C109.2 C110.2 C111.2 C112.2 C113.2 C114.2 FB11.2 LDO_VREG5.GND LED5.C U$15.2 U$15.5 U$15.6 U$16.3 U$16.6 U$16.11 U$16.14 U$16.28 U$16.33 U$17.P$1 XOSC5.2 XOSC5.4 XOSCRF5.2 XOSCRF5.4
GND6: ANT7.3 BTN6.2 C115.2 C116.2 C119.2 C120.1 C121.2 C122.2 C123.2 C124.2 C125.1 C126.1 C127.1 C128.2 C129.2 C130.2 C131.2 C132.2 C133.2 FB13.2 LDO_VREG6.GND LED6.C U$18.2 U$18.5 U$18.6 U$19.3 U$19.6 U$19.11 U$19.14 U$19.28 U$19.33 U$20.P$1 XOSC6.2 XOSC6.4 XOSCRF6.2 XOSCRF6.4
GND7: ANT8.3 BTN7.2 C134.2 C135.2 C138.2 C139.1 C140.2 C141.2 C142.2 C143.2 C144.1 C145.1 C146.1 C147.2 C148.2 C149.2 C150.2 C151.2 C152.2 FB15.2 LDO_VREG7.GND LED7.C U$21.2 U$21.5 U$21.6 U$22.3 U$22.6 U$22.11 U$22.14 U$22.28 U$22.33 U$23.P$1 XOSC7.2 XOSC7.4 XOSCRF7.2 XOSCRF7.4
GND8: ANT9.3 BTN8.2 C153.2 C154.2 C157.2 C158.1 C159.2 C160.2 C161.2 C162.2 C163.1 C164.1 C165.1 C166.2 C167.2 C168.2 C169.2 C170.2 C171.2 FB17.2 LDO_VREG8.GND LED8.C U$24.2 U$24.5 U$24.6 U$25.3 U$25.6 U$25.11 U$25.14 U$25.28 U$25.33 U$26.P$1 XOSC8.2 XOSC8.4 XOSCRF8.2 XOSCRF8.4
GND9: ANT10.3 BTN9.2 C172.2 C173.2 C176.2 C177.1 C178.2 C179.2 C180.2 C181.2 C182.1 C183.1 C184.1 C185.2 C186.2 C187.2 C188.2 C189.2 C190.2 FB19.2 LDO_VREG9.GND LED9.C U$27.2 U$27.5 U$27.6 U$28.3 U$28.6 U$28.11 U$28.14 U$28.28 U$28.33 U$29.P$1 XOSC9.2 XOSC9.4 XOSCRF9.2 XOSCRF9.4
N$1: C11.2 U$12.3
N$2: ANT1.2 C13.1
N$3: C12.2 U$12.4
N$4: CN1.VBUS FB2.1
N$5: CN1.GND FB1.1
N$10: BTN1.1 R3.1
N$11: LED1.A R6.2
N$12: C20.2 U$2.3
N$13: LED.A R4.2
N$14: C23.2 U$2.4
N$15: ANT2.2 C24.1
N$16: CN2.GND FB3.1
N$17: CN2.VBUS FB4.1
N$22: BTN2.1 R7.1
N$23: LED2.A R9.2
N$24: C41.2 U$5.3
N$25: C42.2 U$5.4
N$26: BTN.1 R1.1
N$27: ANT3.2 C43.1
N$28: CN3.GND FB5.1
N$29: CN3.VBUS FB6.1
N$34: BTN3.1 R10.1
N$35: LED3.A R12.2
N$36: C60.2 U$8.3
N$37: C61.2 U$8.4
N$38: ANT4.2 C62.1
N$39: CN4.GND FB7.1
N$40: CN4.VBUS FB8.1
N$45: BTN4.1 R13.1
N$46: LED4.A R15.2
N$47: C79.2 U$11.3
N$48: C80.2 U$11.4
N$49: ANT5.2 C81.1
N$50: CN5.GND FB9.1
N$51: CN5.VBUS FB10.1
N$56: BTN5.1 R16.1
N$57: LED5.A R18.2
N$58: C98.2 U$15.3
N$59: C99.2 U$15.4
N$60: ANT6.2 C100.1
N$61: CN6.GND FB11.1
N$62: CN6.VBUS FB12.1
N$67: BTN6.1 R19.1
N$68: LED6.A R21.2
N$69: C117.2 U$18.3
N$70: C118.2 U$18.4
N$71: ANT7.2 C119.1
N$72: CN7.GND FB13.1
N$73: CN7.VBUS FB14.1
N$78: BTN7.1 R22.1
N$79: LED7.A R24.2
N$80: C136.2 U$21.3
N$81: C137.2 U$21.4
N$82: ANT8.2 C138.1
N$83: CN8.GND FB15.1
N$84: CN8.VBUS FB16.1
N$89: BTN8.1 R25.1
N$90: LED8.A R27.2
N$91: C155.2 U$24.3
N$92: C156.2 U$24.4
N$93: ANT9.2 C157.1
N$94: CN9.GND FB17.1
N$95: CN9.VBUS FB18.1
N$100: BTN9.1 R28.1
N$101: LED9.A R30.2
N$102: C174.2 U$27.3
N$103: C175.2 U$27.4
N$104: ANT10.2 C176.1
N$105: CN10.GND FB19.1
N$106: CN10.VBUS FB20.1
PA1: U$3.25
PA2: U$3.27
PA3: U$6.25
PA4: U$6.27
PA5: U$9.25
PA6: U$9.27
PA06/A0: U$76.7
PA06/A1: U$3.7
PA06/A2: U$6.7
PA06/A3: U$9.7
PA06/A4: U$13.7
PA06/A5: U$16.7
PA06/A6: U$19.7
PA06/A7: U$22.7
PA06/A8: U$25.7
PA06/A9: U$28.7
PA7: U$13.25
PA07/A1: U$76.8
PA07/A2: U$3.8
PA07/A3: U$6.8
PA07/A4: U$9.8
PA07/A5: U$13.8
PA07/A6: U$16.8
PA07/A7: U$19.8
PA07/A8: U$22.8
PA07/A9: U$25.8
PA07/A10: U$28.8
PA8: U$13.27
PA08/I2C/SDA: U$76.9
PA08/I2C/SDA1: U$3.9
PA08/I2C/SDA2: U$6.9
PA08/I2C/SDA3: U$9.9
PA08/I2C/SDA4: U$13.9
PA08/I2C/SDA5: U$16.9
PA08/I2C/SDA6: U$19.9
PA08/I2C/SDA7: U$22.9
PA08/I2C/SDA8: U$25.9
PA08/I2C/SDA9: U$28.9
PA9: U$16.25
PA09/I2C/SCL: U$76.10
PA09/I2C/SCL1: U$3.10
PA09/I2C/SCL2: U$6.10
PA09/I2C/SCL3: U$9.10
PA09/I2C/SCL4: U$13.10
PA09/I2C/SCL5: U$16.10
PA09/I2C/SCL6: U$19.10
PA09/I2C/SCL7: U$22.10
PA09/I2C/SCL8: U$25.10
PA09/I2C/SCL9: U$28.10
PA10: U$16.27
PA11: U$19.25
PA12: U$19.27
PA13: U$22.25
PA14: U$22.27
PA14/XIN_MC/RX: C3.2 U$76.15 XOSC.1
PA14/XIN_MC/RX1: C32.2 U$3.15 XOSC1.1
PA14/XIN_MC/RX2: C51.2 U$6.15 XOSC2.1
PA14/XIN_MC/RX3: C70.2 U$9.15 XOSC3.1
PA14/XIN_MC/RX4: C89.2 U$13.15 XOSC4.1
PA14/XIN_MC/RX5: C108.2 U$16.15 XOSC5.1
PA14/XIN_MC/RX6: C127.2 U$19.15 XOSC6.1
PA14/XIN_MC/RX7: C146.2 U$22.15 XOSC7.1
PA14/XIN_MC/RX8: C165.2 U$25.15 XOSC8.1
PA14/XIN_MC/RX9: C184.2 U$28.15 XOSC9.1
PA15: U$25.25
PA15/XOUT_MC/TX: C4.1 U$76.16 XOSC.3
PA15/XOUT_MC/TX1: C33.1 U$3.16 XOSC1.3
PA15/XOUT_MC/TX2: C52.1 U$6.16 XOSC2.3
PA15/XOUT_MC/TX3: C71.1 U$9.16 XOSC3.3
PA15/XOUT_MC/TX4: C90.1 U$13.16 XOSC4.3
PA15/XOUT_MC/TX5: C109.1 U$16.16 XOSC5.3
PA15/XOUT_MC/TX6: C128.1 U$19.16 XOSC6.3
PA15/XOUT_MC/TX7: C147.1 U$22.16 XOSC7.3
PA15/XOUT_MC/TX8: C166.1 U$25.16 XOSC8.3
PA15/XOUT_MC/TX9: C185.1 U$28.16 XOSC9.3
PA16: U$25.27
PA16/I2C: U$76.17
PA16/I2C1: U$3.17
PA16/I2C2: U$6.17
PA16/I2C3: U$9.17
PA16/I2C4: U$13.17
PA16/I2C5: U$16.17
PA16/I2C6: U$19.17
PA16/I2C7: U$22.17
PA16/I2C8: U$25.17
PA16/I2C9: U$28.17
PA17: U$28.25
PA17/I2C: U$76.18
PA17/I2C1: U$3.18
PA17/I2C2: U$6.18
PA17/I2C3: U$9.18
PA17/I2C4: U$13.18
PA17/I2C5: U$16.18
PA17/I2C6: U$19.18
PA17/I2C7: U$22.18
PA17/I2C8: U$25.18
PA17/I2C9: U$28.18
PA18: U$28.27
PA18/INTA: U$76.19
PA18/INTA1: U$3.19
PA18/INTA2: U$6.19
PA18/INTA3: U$9.19
PA18/INTA4: U$13.19
PA18/INTA5: U$16.19
PA18/INTA6: U$19.19
PA18/INTA7: U$22.19
PA18/INTA8: U$25.19
PA18/INTA9: U$28.19
PA19/FSYNC: U$76.20
PA19/FSYNC1: U$3.20
PA19/FSYNC2: U$6.20
PA19/FSYNC3: U$9.20
PA19/FSYNC4: U$13.20
PA19/FSYNC5: U$16.20
PA19/FSYNC6: U$19.20
PA19/FSYNC7: U$22.20
PA19/FSYNC8: U$25.20
PA19/FSYNC9: U$28.20
PA24/USBDM: CN1.D- U$76.22
PA24/USBDM1: CN2.D- U$3.22
PA24/USBDM2: CN3.D- U$6.22
PA24/USBDM3: CN4.D- U$9.22
PA24/USBDM4: CN5.D- U$13.22
PA24/USBDM5: CN6.D- U$16.22
PA24/USBDM6: CN7.D- U$19.22
PA24/USBDM7: CN8.D- U$22.22
PA24/USBDM8: CN9.D- U$25.22
PA24/USBDM9: CN10.D- U$28.22
PA25/USBDP: CN1.D+ U$76.23
PA25/USBDP1: CN2.D+ U$3.23
PA25/USBDP2: CN3.D+ U$6.23
PA25/USBDP3: CN4.D+ U$9.23
PA25/USBDP4: CN5.D+ U$13.23
PA25/USBDP5: CN6.D+ U$16.23
PA25/USBDP6: CN7.D+ U$19.23
PA25/USBDP7: CN8.D+ U$22.23
PA25/USBDP8: CN9.D+ U$25.23
PA25/USBDP9: CN10.D+ U$28.23
PA27: U$76.25
PA28: U$76.27
PA30/SWCLK: R4.1 U$1.P$4 U$76.31
PA30/SWCLK1: R6.1 U$3.31 U$4.P$4
PA30/SWCLK2: R9.1 U$6.31 U$7.P$4
PA30/SWCLK3: R12.1 U$9.31 U$10.P$4
PA30/SWCLK4: R15.1 U$13.31 U$14.P$4
PA30/SWCLK5: R18.1 U$16.31 U$17.P$4
PA30/SWCLK6: R21.1 U$19.31 U$20.P$4
PA30/SWCLK7: R24.1 U$22.31 U$23.P$4
PA30/SWCLK8: R27.1 U$25.31 U$26.P$4
PA30/SWCLK9: R30.1 U$28.31 U$29.P$4
PA31/SWDIO: U$1.P$5 U$76.32
PA31/SWDIO1: U$3.32 U$4.P$5
PA31/SWDIO2: U$6.32 U$7.P$5
PA31/SWDIO3: U$9.32 U$10.P$5
PA31/SWDIO4: U$13.32 U$14.P$5
PA31/SWDIO5: U$16.32 U$17.P$5
PA31/SWDIO6: U$19.32 U$20.P$5
PA31/SWDIO7: U$22.32 U$23.P$5
PA31/SWDIO8: U$25.32 U$26.P$5
PA31/SWDIO9: U$28.32 U$29.P$5
RESET: C1.1 R1.2 R2.1 U$1.P$3 U$76.26
RESET1: C18.1 R3.2 R5.1 U$3.26 U$4.P$3
RESET2: C39.1 R7.2 R8.1 U$6.26 U$7.P$3
RESET3: C58.1 R10.2 R11.1 U$9.26 U$10.P$3
RESET4: C77.1 R13.2 R14.1 U$13.26 U$14.P$3
RESET5: C96.1 R16.2 R17.1 U$16.26 U$17.P$3
RESET6: C115.1 R19.2 R20.1 U$19.26 U$20.P$3
RESET7: C134.1 R22.2 R23.1 U$22.26 U$23.P$3
RESET8: C153.1 R25.2 R26.1 U$25.26 U$26.P$3
RESET9: C172.1 R28.2 R29.1 U$28.26 U$29.P$3
RFN: C11.1 U$76.13
RFN1: C20.1 U$3.13
RFN2: C41.1 U$6.13
RFN3: C60.1 U$9.13
RFN4: C79.1 U$13.13
RFN5: C98.1 U$16.13
RFN6: C117.1 U$19.13
RFN7: C136.1 U$22.13
RFN8: C155.1 U$25.13
RFN9: C174.1 U$28.13
RFP: C12.1 U$76.12
RFP1: C23.1 U$3.12
RFP2: C42.1 U$6.12
RFP3: C61.1 U$9.12
RFP4: C80.1 U$13.12
RFP5: C99.1 U$16.12
RFP6: C118.1 U$19.12
RFP7: C137.1 U$22.12
RFP8: C156.1 U$25.12
RFP9: C175.1 U$28.12
VDDANA: C8.1 C22.2 L6.2 U$76.4
VDDANA1: C31.2 C37.1 L1.2 U$3.4
VDDANA2: C50.2 C56.1 L2.2 U$6.4
VDDANA3: C69.2 C75.1 L3.2 U$9.4
VDDANA4: C88.2 C94.1 L4.2 U$13.4
VDDANA5: C107.2 C113.1 L5.2 U$16.4
VDDANA6: C126.2 C132.1 L7.2 U$19.4
VDDANA7: C145.2 C151.1 L8.2 U$22.4
VDDANA8: C164.2 C170.1 L9.2 U$25.4
VDDANA9: C183.2 C189.1 L10.2 U$28.4
VDDCORE: C9.1 U$76.29
VDDCORE1: C38.1 U$3.29
VDDCORE2: C57.1 U$6.29
VDDCORE3: C76.1 U$9.29
VDDCORE4: C95.1 U$13.29
VDDCORE5: C114.1 U$16.29
VDDCORE6: C133.1 U$19.29
VDDCORE7: C152.1 U$22.29
VDDCORE8: C171.1 U$25.29
VDDCORE9: C190.1 U$28.29
VIN: C6.1 C7.1 FB2.2 LDO_VREG.VIN
VIN1: C35.1 C36.1 FB4.2 LDO_VREG1.VIN
VIN2: C54.1 C55.1 FB6.2 LDO_VREG2.VIN
VIN3: C73.1 C74.1 FB8.2 LDO_VREG3.VIN
VIN4: C92.1 C93.1 FB10.2 LDO_VREG4.VIN
VIN5: C111.1 C112.1 FB12.2 LDO_VREG5.VIN
VIN6: C130.1 C131.1 FB14.2 LDO_VREG6.VIN
VIN7: C149.1 C150.1 FB16.2 LDO_VREG7.VIN
VIN8: C168.1 C169.1 FB18.2 LDO_VREG8.VIN
VIN9: C187.1 C188.1 FB20.2 LDO_VREG9.VIN
XTALIN: C14.2 U$76.2 XOSCRF.1
XTALIN1: C25.2 U$3.2 XOSCRF1.1
XTALIN2: C44.2 U$6.2 XOSCRF2.1
XTALIN3: C63.2 U$9.2 XOSCRF3.1
XTALIN4: C82.2 U$13.2 XOSCRF4.1
XTALIN5: C101.2 U$16.2 XOSCRF5.1
XTALIN6: C120.2 U$19.2 XOSCRF6.1
XTALIN7: C139.2 U$22.2 XOSCRF7.1
XTALIN8: C158.2 U$25.2 XOSCRF8.1
XTALIN9: C177.2 U$28.2 XOSCRF9.1
XTALOUT: C15.1 U$76.1 XOSCRF.3
XTALOUT1: C26.1 U$3.1 XOSCRF1.3
XTALOUT2: C45.1 U$6.1 XOSCRF2.3
XTALOUT3: C64.1 U$9.1 XOSCRF3.3
XTALOUT4: C83.1 U$13.1 XOSCRF4.3
XTALOUT5: C102.1 U$16.1 XOSCRF5.3
XTALOUT6: C121.1 U$19.1 XOSCRF6.3
XTALOUT7: C140.1 U$22.1 XOSCRF7.3
XTALOUT8: C159.1 U$25.1 XOSCRF8.3
XTALOUT9: C178.1 U$28.1 XOSCRF9.3

## Tracks (layer width: path | path; a pad name or v marks a point on that pad's centre or on a via)
3.3V  (via drill 0.2 pad 0.51)
  Top 0.203: LDO_VREG.VOUT 17.08,16.32 17.27,16.51 17.27,17.65 17.53,17.91 19.56,17.91 19.81,18.16 C5.1 | U$76.24 20.09,13.56 19.68,13.97 C10.1 19.4,13.56 19.18,13.34 17.65,13.34 17.02,12.7 17.02,11.94 16.76,11.68 | 15.11,11.68 15.11,16.32 | 16.76,11.68 U$1.P$2 | U$76.30 17.95,9.66 C16.1 17.3,9.49 17.02,9.78 17.02,11.43 16.76,11.68 | R2.2 14.73,6.35 15.11,6.73 15.11,11.68 | 15.88,11.68 U$1.P$2 | U$1.P$2 15.11,11.68
  Top 0.254: LDO_VREG.VOUT 15.11,16.32 14.92,16.32 C21.2
  Bottom 0.203: L6.1 21.08,4.57 16.26,4.57 14.57,6.25 R2.2
  other vias: 21.84,3.81 14.57,6.35
3.3V1  (via drill 0.2 pad 0.51)
  Top 0.203: LDO_VREG1.VOUT 17.08,35.63 17.27,35.81 17.27,36.96 17.53,37.21 19.56,37.21 19.81,37.47 C34.1 | U$3.24 20.09,32.87 19.68,33.27 C19.1 19.4,32.86 19.18,32.64 17.65,32.64 17.02,32 17.02,31.24 16.76,30.99 | 15.11,30.99 15.11,35.63 | 16.76,30.99 U$4.P$2 | U$3.30 17.95,28.97 C27.1 17.3,28.8 17.02,29.08 17.02,30.73 16.76,30.99 | R5.2 14.73,25.65 15.11,26.04 15.11,30.99 | 15.88,30.99 U$4.P$2 | U$4.P$2 15.11,30.99
  Top 0.254: LDO_VREG1.VOUT 15.11,35.63 14.92,35.63 C30.2
  Bottom 0.203: L1.1 21.08,23.88 16.26,23.88 14.57,25.56 R5.2
  other vias: 21.84,23.11 14.57,25.65
3.3V2  (via drill 0.2 pad 0.51)
  Top 0.203: LDO_VREG2.VOUT 17.08,54.93 17.27,55.12 17.27,56.26 17.53,56.52 19.56,56.52 19.81,56.77 C53.1 | U$6.24 20.09,52.17 19.68,52.58 C40.1 19.4,52.17 19.18,51.94 17.65,51.94 17.02,51.31 17.02,50.55 16.76,50.29 | 15.11,50.29 15.11,54.93 | 16.76,50.29 U$7.P$2 | U$6.30 17.95,48.27 C46.1 17.3,48.1 17.02,48.39 17.02,50.04 16.76,50.29 | R8.2 14.73,44.96 15.11,45.34 15.11,50.29 | 15.88,50.29 U$7.P$2 | U$7.P$2 15.11,50.29
  Top 0.254: LDO_VREG2.VOUT 15.11,54.93 14.92,54.93 C49.2
  Bottom 0.203: L2.1 21.08,43.18 16.26,43.18 14.57,44.86 R8.2
  other vias: 21.84,42.42 14.57,44.96
3.3V3  (via drill 0.2 pad 0.51)
  Top 0.203: LDO_VREG3.VOUT 17.08,74.23 17.27,74.42 17.27,75.56 17.53,75.82 19.56,75.82 19.81,76.07 C72.1 | U$9.24 20.09,71.47 19.68,71.88 C59.1 19.4,71.47 19.18,71.25 17.65,71.25 17.02,70.61 17.02,69.85 16.76,69.6 | 15.11,69.6 15.11,74.23 | 16.76,69.6 U$10.P$2 | U$9.30 17.95,67.58 C65.1 17.3,67.41 17.02,67.69 17.02,69.34 16.76,69.6 | R11.2 14.73,64.26 15.11,64.64 15.11,69.6 | 15.88,69.6 U$10.P$2 | U$10.P$2 15.11,69.6
  Top 0.254: LDO_VREG3.VOUT 15.11,74.23 14.92,74.23 C68.2
  Bottom 0.203: L3.1 21.08,62.48 16.26,62.48 14.57,64.17 R11.2
  other vias: 21.84,61.72 14.57,64.26
3.3V4  (via drill 0.2 pad 0.51)
  Top 0.203: LDO_VREG4.VOUT 17.08,93.54 17.27,93.73 17.27,94.87 17.53,95.12 19.56,95.12 19.81,95.38 C91.1 | U$13.24 20.09,90.78 19.68,91.19 C78.1 19.4,90.77 19.18,90.55 17.65,90.55 17.02,89.92 17.02,89.15 16.76,88.9 | 15.11,88.9 15.11,93.54 | 16.76,88.9 U$14.P$2 | U$13.30 17.95,86.88 C84.1 17.3,86.71 17.02,87 17.02,88.65 16.76,88.9 | R14.2 14.73,83.57 15.11,83.95 15.11,88.9 | 15.88,88.9 U$14.P$2 | U$14.P$2 15.11,88.9
  Top 0.254: LDO_VREG4.VOUT 15.11,93.54 14.92,93.54 C87.2
  Bottom 0.203: L4.1 21.08,81.79 16.26,81.79 14.57,83.47 R14.2
  other vias: 21.84,81.03 14.57,83.57
3.3V5  (via drill 0.2 pad 0.51)
  Top 0.203: LDO_VREG5.VOUT 57.72,16.32 57.91,16.51 57.91,17.65 58.17,17.91 60.2,17.91 60.45,18.16 C110.1 | U$16.24 60.73,13.56 60.33,13.97 C97.1 60.04,13.56 59.82,13.34 58.29,13.34 57.66,12.7 57.66,11.94 57.4,11.68 | 55.75,11.68 55.75,16.32 | 57.4,11.68 U$17.P$2 | U$16.30 58.59,9.66 C103.1 57.94,9.49 57.66,9.78 57.66,11.43 57.4,11.68 | R17.2 55.37,6.35 55.75,6.73 55.75,11.68 | 56.52,11.68 U$17.P$2 | U$17.P$2 55.75,11.68
  Top 0.254: LDO_VREG5.VOUT 55.75,16.32 55.56,16.32 C106.2
  Bottom 0.203: L5.1 61.72,4.57 56.9,4.57 55.21,6.25 R17.2
  other vias: 62.48,3.81 55.21,6.35
3.3V6  (via drill 0.2 pad 0.51)
  Top 0.203: LDO_VREG6.VOUT 57.72,35.63 57.91,35.81 57.91,36.96 58.17,37.21 60.2,37.21 60.45,37.47 C129.1 | U$19.24 60.73,32.87 60.33,33.27 C116.1 60.04,32.86 59.82,32.64 58.29,32.64 57.66,32 57.66,31.24 57.4,30.99 | 55.75,30.99 55.75,35.63 | 57.4,30.99 U$20.P$2 | U$19.30 58.59,28.97 C122.1 57.94,28.8 57.66,29.08 57.66,30.73 57.4,30.99 | R20.2 55.37,25.65 55.75,26.04 55.75,30.99 | 56.52,30.99 U$20.P$2 | U$20.P$2 55.75,30.99
  Top 0.254: LDO_VREG6.VOUT 55.75,35.63 55.56,35.63 C125.2
  Bottom 0.203: L7.1 61.72,23.88 56.9,23.88 55.21,25.56 R20.2
  other vias: 62.48,23.11 55.21,25.65
3.3V7  (via drill 0.2 pad 0.51)
  Top 0.203: LDO_VREG7.VOUT 57.72,54.93 57.91,55.12 57.91,56.26 58.17,56.52 60.2,56.52 60.45,56.77 C148.1 | U$22.24 60.73,52.17 60.33,52.58 C135.1 60.04,52.17 59.82,51.94 58.29,51.94 57.66,51.31 57.66,50.55 57.4,50.29 | 55.75,50.29 55.75,54.93 | 57.4,50.29 U$23.P$2 | U$22.30 58.59,48.27 C141.1 57.94,48.1 57.66,48.39 57.66,50.04 57.4,50.29 | R23.2 55.37,44.96 55.75,45.34 55.75,50.29 | 56.52,50.29 U$23.P$2 | U$23.P$2 55.75,50.29
  Top 0.254: LDO_VREG7.VOUT 55.75,54.93 55.56,54.93 C144.2
  Bottom 0.203: L8.1 61.72,43.18 56.9,43.18 55.21,44.86 R23.2
  other vias: 62.48,42.42 55.21,44.96
3.3V8  (via drill 0.2 pad 0.51)
  Top 0.203: LDO_VREG8.VOUT 57.72,74.23 57.91,74.42 57.91,75.56 58.17,75.82 60.2,75.82 60.45,76.07 C167.1 | U$25.24 60.73,71.47 60.33,71.88 C154.1 60.04,71.47 59.82,71.25 58.29,71.25 57.66,70.61 57.66,69.85 57.4,69.6 | 55.75,69.6 55.75,74.23 | 57.4,69.6 U$26.P$2 | U$25.30 58.59,67.58 C160.1 57.94,67.41 57.66,67.69 57.66,69.34 57.4,69.6 | R26.2 55.37,64.26 55.75,64.64 55.75,69.6 | 56.52,69.6 U$26.P$2 | U$26.P$2 55.75,69.6
  Top 0.254: LDO_VREG8.VOUT 55.75,74.23 55.56,74.23 C163.2
  Bottom 0.203: L9.1 61.72,62.48 56.9,62.48 55.21,64.17 R26.2
  other vias: 62.48,61.72 55.21,64.26
3.3V9  (via drill 0.2 pad 0.51)
  Top 0.203: LDO_VREG9.VOUT 57.72,93.54 57.91,93.73 57.91,94.87 58.17,95.12 60.2,95.12 60.45,95.38 C186.1 | U$28.24 60.73,90.78 60.33,91.19 C173.1 60.04,90.77 59.82,90.55 58.29,90.55 57.66,89.92 57.66,89.15 57.4,88.9 | 55.75,88.9 55.75,93.54 | 57.4,88.9 U$29.P$2 | U$28.30 58.59,86.88 C179.1 57.94,86.71 57.66,87 57.66,88.65 57.4,88.9 | R29.2 55.37,83.57 55.75,83.95 55.75,88.9 | 56.52,88.9 U$29.P$2 | U$29.P$2 55.75,88.9
  Top 0.254: LDO_VREG9.VOUT 55.75,93.54 55.56,93.54 C182.2
  Bottom 0.203: L10.1 61.72,81.79 56.9,81.79 55.21,83.47 R29.2
  other vias: 62.48,81.03 55.21,83.57
ANT_OUT
  Top 0.203: ANT1.1 31.61,11.55 31.5,11.43 29.47,11.43 U$12.1
ANT_OUT1
  Top 0.203: ANT2.1 31.61,30.85 31.5,30.73 29.47,30.73 U$2.1
ANT_OUT2
  Top 0.203: ANT3.1 31.61,50.15 31.5,50.04 29.47,50.04 U$5.1
ANT_OUT3
  Top 0.203: ANT4.1 31.61,69.46 31.5,69.34 29.47,69.34 U$8.1
ANT_OUT4
  Top 0.203: ANT5.1 31.61,88.76 31.5,88.65 29.47,88.65 U$11.1
ANT_OUT5
  Top 0.203: ANT6.1 72.25,11.55 72.14,11.43 70.11,11.43 U$15.1
ANT_OUT6
  Top 0.203: ANT7.1 72.25,30.85 72.14,30.73 70.11,30.73 U$18.1
ANT_OUT7
  Top 0.203: ANT8.1 72.25,50.15 72.14,50.04 70.11,50.04 U$21.1
ANT_OUT8
  Top 0.203: ANT9.1 72.25,69.46 72.14,69.34 70.11,69.34 U$24.1
ANT_OUT9
  Top 0.203: ANT10.1 72.25,88.76 72.14,88.65 70.11,88.65 U$27.1
AVDD
  Top 0.203: U$76.5 22.09,6.44 C17.1
AVDD1
  Top 0.203: U$3.5 22.09,25.75 C28.1
AVDD2
  Top 0.203: U$6.5 22.09,45.05 C47.1
AVDD3
  Top 0.203: U$9.5 22.09,64.35 C66.1
AVDD4
  Top 0.203: U$13.5 22.09,83.66 C85.1
AVDD5
  Top 0.203: U$16.5 62.73,6.44 C104.1
AVDD6
  Top 0.203: U$19.5 62.73,25.75 C123.1
AVDD7
  Top 0.203: U$22.5 62.73,45.05 C142.1
AVDD8
  Top 0.203: U$25.5 62.73,64.35 C161.1
AVDD9
  Top 0.203: U$28.5 62.73,83.66 C180.1
DVDD
  Top 0.203: U$76.21 21.59,13.59 21.84,13.84 21.84,14.86 21.72,14.99 C2.1
DVDD1
  Top 0.203: U$3.21 21.59,32.9 21.84,33.15 21.84,34.16 21.72,34.29 C29.1
DVDD2
  Top 0.203: U$6.21 21.59,52.2 21.84,52.45 21.84,53.47 21.72,53.59 C48.1
DVDD3
  Top 0.203: U$9.21 21.59,71.5 21.84,71.75 21.84,72.77 21.72,72.9 C67.1
DVDD4
  Top 0.203: U$13.21 21.59,90.81 21.84,91.06 21.84,92.08 21.72,92.2 C86.1
DVDD5
  Top 0.203: U$16.21 62.23,13.59 62.48,13.84 62.48,14.86 62.36,14.99 C105.1
DVDD6
  Top 0.203: U$19.21 62.23,32.9 62.48,33.15 62.48,34.16 62.36,34.29 C124.1
DVDD7
  Top 0.203: U$22.21 62.23,52.2 62.48,52.45 62.48,53.47 62.36,53.59 C143.1
DVDD8
  Top 0.203: U$25.21 62.23,71.5 62.48,71.75 62.48,72.77 62.36,72.9 C162.1
DVDD9
  Top 0.203: U$28.21 62.23,90.81 62.48,91.06 62.48,92.08 62.36,92.2 C181.1
GND  (via drill 0.2 pad 0.51)
  Top 0.203: LDO_VREG.GND 16.7,18.22 17.02,18.54 v17.53,18.54 C5.2 | XOSC.2 20.87,18.07 v19.81,17.02 C6.2 19.81,15.65 | XOSC.4 24.35,16.86 C4.2 C3.1 | U$76.33 22.59,11.16 U$76.14 25.64,11.16 25.78,11.3 26.42,11.3 | 26.42,11.3 26.8,11.3 27.18,11.68 27.18,12.19 27.43,12.45 28.7,12.45 | 28.7,12.45 28.96,12.45 29.21,12.7 29.21,13.3 C13.2 | 28.7,12.45 U$12.2 U$12.5 28.7,8.38 28.96,8.13 29.46,8.13 29.72,8.38 | ANT1.3 31.24,8.64 30.99,8.38 29.72,8.38 | 29.72,8.38 29.35,8.75 U$12.6 | BTN.2 14.57,3.91 C1.2 14.57,5.18 14.73,5.33 15.88,5.33 XOSCRF.4 | XOSCRF.4 16.47,5.37 17.02,4.83 17.02,4.57 17.82,3.77 XOSCRF.2 18.51,4.16 C14.1 C15.2 | 22.59,9.66 U$76.6 22.59,6.46 C17.2 23.24,6.35 v23.5,6.1 24.13,5.46 C8.2 | U$76.33 21.59,10.66 U$76.28 18.67,10.66 18.41,10.92 17.88,10.92 C9.2 | 19.81,15.65 C7.2 19.4,14.83 19.18,14.61 18.92,14.61 18.7,14.38 C10.2 17.02,13.97 U$1.P$1 | C16.2 v17.78,8.13 | XOSCRF.4 15.92,6.65 v16,6.73 | U$76.3 21.09,9.66 U$76.33 | C8.2 23.27,4.92 C22.1 | C8.2 24.55,4.92 LED.C | C2.2 19.81,15.65 | v27.94,14.22 v27.94,13.46 v27.18,13.46 v26.42,13.46 v26.42,12.7 v26.42,11.94 26.42,11.3 | v27.18,5.84 v26.42,5.84 v26.42,6.6 v26.42,7.37 v26.42,8.13 v26.42,8.89 v25.65,8.89 25.4,9.14 25.4,9.4 25.13,9.66 U$76.11 22.59,9.66 | 22.59,9.66 U$76.33
  Top 0.254: FB1.2 14.48,17.78 C21.1 15.43,18.22 LDO_VREG.GND
  Bottom 0.203: v19.81,17.02 19.81,17.27 19.56,17.53 17.78,17.53 17.53,17.78 v17.53,18.54 | XOSC.2 22.36,18.07 XOSC.4 | v23.5,6.1 22.73,6.86 18.29,6.86 17.78,7.37 | 17.78,7.37 v17.78,8.13 | 17.78,7.37 17.14,6.73 v16,6.73 15.37,6.73 14.73,7.37 14.22,7.37 13.72,7.87 13.72,9.65 14.73,10.67 14.73,11.94 15.75,12.95 U$1.P$1
  other vias: 21.76,18.07 23.96,16.47
  pour Bottom (isolate 0.508): 7.87,19.05 25.65,19.05 26.92,17.78 27.94,17.78 27.94,13.46 26.42,13.46 26.42,5.84 28.19,5.84 28.19,2.79 7.87,2.79
  pour Top (isolate 0.508): 7.87,19.05 25.65,19.05 26.92,17.78 27.94,17.78 27.94,13.46 26.42,13.46 26.42,5.84 28.19,5.84 28.19,2.79 7.87,2.79
GND1  (via drill 0.2 pad 0.51)
  Top 0.203: LDO_VREG1.GND 16.7,37.53 17.02,37.85 v17.53,37.85 C34.2 | XOSC1.2 20.87,37.38 v19.81,36.32 C35.2 19.81,34.96 | XOSC1.4 24.35,36.16 C33.2 C32.1 | U$3.33 22.59,30.47 U$3.14 25.64,30.47 25.78,30.61 26.42,30.61 | 26.42,30.61 26.8,30.61 27.18,30.99 27.18,31.5 27.43,31.75 28.7,31.75 | 28.7,31.75 28.96,31.75 29.21,32 29.21,32.61 C24.2 | 28.7,31.75 U$2.2 U$2.5 28.7,27.69 28.96,27.43 29.46,27.43 29.72,27.69 | ANT2.3 31.24,27.94 30.99,27.69 29.72,27.69 | 29.72,27.69 29.35,28.05 U$2.6 | BTN1.2 14.57,23.21 C18.2 14.57,24.48 14.73,24.64 15.88,24.64 XOSCRF1.4 | XOSCRF1.4 16.47,24.68 17.02,24.13 17.02,23.88 17.82,23.08 XOSCRF1.2 18.51,23.46 C25.1 C26.2 | 22.59,28.97 U$3.6 22.59,25.76 C28.2 23.24,25.65 v23.5,25.4 24.13,24.77 C37.2 | U$3.33 21.59,29.97 U$3.28 18.67,29.97 18.41,30.23 17.88,30.23 C38.2 | 19.81,34.96 C36.2 19.4,34.13 19.18,33.91 18.92,33.91 18.7,33.69 C19.2 17.02,33.27 U$4.P$1 | C27.2 v17.78,27.43 | XOSCRF1.4 15.92,25.95 v16,26.04 | U$3.3 21.09,28.97 U$3.33 | C37.2 23.27,24.23 C31.1 | C37.2 24.55,24.23 LED1.C | C29.2 19.81,34.96 | v27.94,33.53 v27.94,32.77 v27.18,32.77 v26.42,32.77 v26.42,32 v26.42,31.24 26.42,30.61 | v27.18,25.15 v26.42,25.15 v26.42,25.91 v26.42,26.67 v26.42,27.43 v26.42,28.19 v25.65,28.19 25.4,28.45 25.4,28.7 25.13,28.97 U$3.11 22.59,28.97 | 22.59,28.97 U$3.33
  Top 0.254: FB3.2 14.48,37.08 C30.1 15.43,37.53 LDO_VREG1.GND
  Bottom 0.203: v19.81,36.32 19.81,36.58 19.56,36.83 17.78,36.83 17.53,37.08 v17.53,37.85 | XOSC1.2 22.36,37.38 XOSC1.4 | v23.5,25.4 22.73,26.16 18.29,26.16 17.78,26.67 | 17.78,26.67 v17.78,27.43 | 17.78,26.67 17.14,26.04 v16,26.04 15.37,26.04 14.73,26.67 14.22,26.67 13.72,27.18 13.72,28.96 14.73,29.97 14.73,31.24 15.75,32.26 U$4.P$1
  other vias: 21.76,37.38 23.96,35.78
  pour Bottom (isolate 0.508): 7.87,38.35 25.65,38.35 26.92,37.08 27.94,37.08 27.94,32.77 26.42,32.77 26.42,25.15 28.19,25.15 28.19,22.1 7.87,22.1
  pour Top (isolate 0.508): 7.87,38.35 25.65,38.35 26.92,37.08 27.94,37.08 27.94,32.77 26.42,32.77 26.42,25.15 28.19,25.15 28.19,22.1 7.87,22.1
GND2  (via drill 0.2 pad 0.51)
  Top 0.203: LDO_VREG2.GND 16.7,56.83 17.02,57.15 v17.53,57.15 C53.2 | XOSC2.2 20.87,56.68 v19.81,55.63 C54.2 19.81,54.26 | XOSC2.4 24.35,55.47 C52.2 C51.1 | U$6.33 22.59,49.77 U$6.14 25.64,49.77 25.78,49.91 26.42,49.91 | 26.42,49.91 26.8,49.91 27.18,50.29 27.18,50.8 27.43,51.05 28.7,51.05 | 28.7,51.05 28.96,51.05 29.21,51.31 29.21,51.91 C43.2 | 28.7,51.05 U$5.2 U$5.5 28.7,46.99 28.96,46.74 29.46,46.74 29.72,46.99 | ANT3.3 31.24,47.24 30.99,46.99 29.72,46.99 | 29.72,46.99 29.35,47.36 U$5.6 | BTN2.2 14.57,42.51 C39.2 14.57,43.78 14.73,43.94 15.88,43.94 XOSCRF2.4 | XOSCRF2.4 16.47,43.98 17.02,43.43 17.02,43.18 17.82,42.38 XOSCRF2.2 18.51,42.77 C44.1 C45.2 | 22.59,48.27 U$6.6 22.59,45.07 C47.2 23.24,44.96 v23.5,44.7 24.13,44.07 C56.2 | U$6.33 21.59,49.27 U$6.28 18.67,49.27 18.41,49.53 17.88,49.53 C57.2 | 19.81,54.26 C55.2 19.4,53.44 19.18,53.21 18.92,53.21 18.7,52.99 C40.2 17.02,52.58 U$7.P$1 | C46.2 v17.78,46.74 | XOSCRF2.4 15.92,45.26 v16,45.34 | U$6.3 21.09,48.27 U$6.33 | C56.2 23.27,43.53 C50.1 | C56.2 24.55,43.53 LED2.C | C48.2 19.81,54.26 | v27.94,52.83 v27.94,52.07 v27.18,52.07 v26.42,52.07 v26.42,51.31 v26.42,50.55 26.42,49.91 | v27.18,44.45 v26.42,44.45 v26.42,45.21 v26.42,45.97 v26.42,46.74 v26.42,47.5 v25.65,47.5 25.4,47.75 25.4,48.01 25.13,48.27 U$6.11 22.59,48.27 | 22.59,48.27 U$6.33
  Top 0.254: FB5.2 14.48,56.39 C49.1 15.43,56.83 LDO_VREG2.GND
  Bottom 0.203: v19.81,55.63 19.81,55.88 19.56,56.13 17.78,56.13 17.53,56.39 v17.53,57.15 | XOSC2.2 22.36,56.68 XOSC2.4 | v23.5,44.7 22.73,45.47 18.29,45.47 17.78,45.97 | 17.78,45.97 v17.78,46.74 | 17.78,45.97 17.14,45.34 v16,45.34 15.37,45.34 14.73,45.97 14.22,45.97 13.72,46.48 13.72,48.26 14.73,49.28 14.73,50.55 15.75,51.56 U$7.P$1
  other vias: 21.76,56.68 23.96,55.08
  pour Bottom (isolate 0.508): 7.87,57.66 25.65,57.66 26.92,56.39 27.94,56.39 27.94,52.07 26.42,52.07 26.42,44.45 28.19,44.45 28.19,41.4 7.87,41.4
  pour Top (isolate 0.508): 7.87,57.66 25.65,57.66 26.92,56.39 27.94,56.39 27.94,52.07 26.42,52.07 26.42,44.45 28.19,44.45 28.19,41.4 7.87,41.4
GND3  (via drill 0.2 pad 0.51)
  Top 0.203: LDO_VREG3.GND 16.7,76.13 17.02,76.45 v17.53,76.45 C72.2 | XOSC3.2 20.87,75.98 v19.81,74.93 C73.2 19.81,73.56 | XOSC3.4 24.35,74.77 C71.2 C70.1 | U$9.33 22.59,69.08 U$9.14 25.64,69.08 25.78,69.22 26.42,69.22 | 26.42,69.22 26.8,69.22 27.18,69.6 27.18,70.1 27.43,70.36 28.7,70.36 | 28.7,70.36 28.96,70.36 29.21,70.61 29.21,71.22 C62.2 | 28.7,70.36 U$8.2 U$8.5 28.7,66.29 28.96,66.04 29.46,66.04 29.72,66.29 | ANT4.3 31.24,66.55 30.99,66.29 29.72,66.29 | 29.72,66.29 29.35,66.66 U$8.6 | BTN3.2 14.57,61.82 C58.2 14.57,63.09 14.73,63.25 15.88,63.25 XOSCRF3.4 | XOSCRF3.4 16.47,63.28 17.02,62.74 17.02,62.48 17.82,61.68 XOSCRF3.2 18.51,62.07 C63.1 C64.2 | 22.59,67.58 U$9.6 22.59,64.37 C66.2 23.24,64.26 v23.5,64.01 24.13,63.37 C75.2 | U$9.33 21.59,68.58 U$9.28 18.67,68.58 18.41,68.83 17.88,68.83 C76.2 | 19.81,73.56 C74.2 19.4,72.74 19.18,72.52 18.92,72.52 18.7,72.29 C59.2 17.02,71.88 U$10.P$1 | C65.2 v17.78,66.04 | XOSCRF3.4 15.92,64.56 v16,64.64 | U$9.3 21.09,67.58 U$9.33 | C75.2 23.27,62.83 C69.1 | C75.2 24.55,62.83 LED3.C | C67.2 19.81,73.56 | v27.94,72.14 v27.94,71.37 v27.18,71.37 v26.42,71.37 v26.42,70.61 v26.42,69.85 26.42,69.22 | v27.18,63.75 v26.42,63.75 v26.42,64.52 v26.42,65.28 v26.42,66.04 v26.42,66.8 v25.65,66.8 25.4,67.06 25.4,67.31 25.13,67.58 U$9.11 22.59,67.58 | 22.59,67.58 U$9.33
  Top 0.254: FB7.2 14.48,75.69 C68.1 15.43,76.13 LDO_VREG3.GND
  Bottom 0.203: v19.81,74.93 19.81,75.18 19.56,75.44 17.78,75.44 17.53,75.69 v17.53,76.45 | XOSC3.2 22.36,75.98 XOSC3.4 | v23.5,64.01 22.73,64.77 18.29,64.77 17.78,65.28 | 17.78,65.28 v17.78,66.04 | 17.78,65.28 17.14,64.64 v16,64.64 15.37,64.64 14.73,65.28 14.22,65.28 13.72,65.79 13.72,67.56 14.73,68.58 14.73,69.85 15.75,70.87 U$10.P$1
  other vias: 21.76,75.98 23.96,74.38